# Altium PCB CardioBit 12-Lead PoC Routed PCB.pcbdoc (part 2 of 2)
Units mm, origin at the board's own origin, x right, y up, seen from the top; angles counter-clockwise.
Board outline 307.5 x 200 mm, 2 copper layers (Top Layer, Bottom Layer); 149 components, 164 nets, 497 pads, 199 vias.
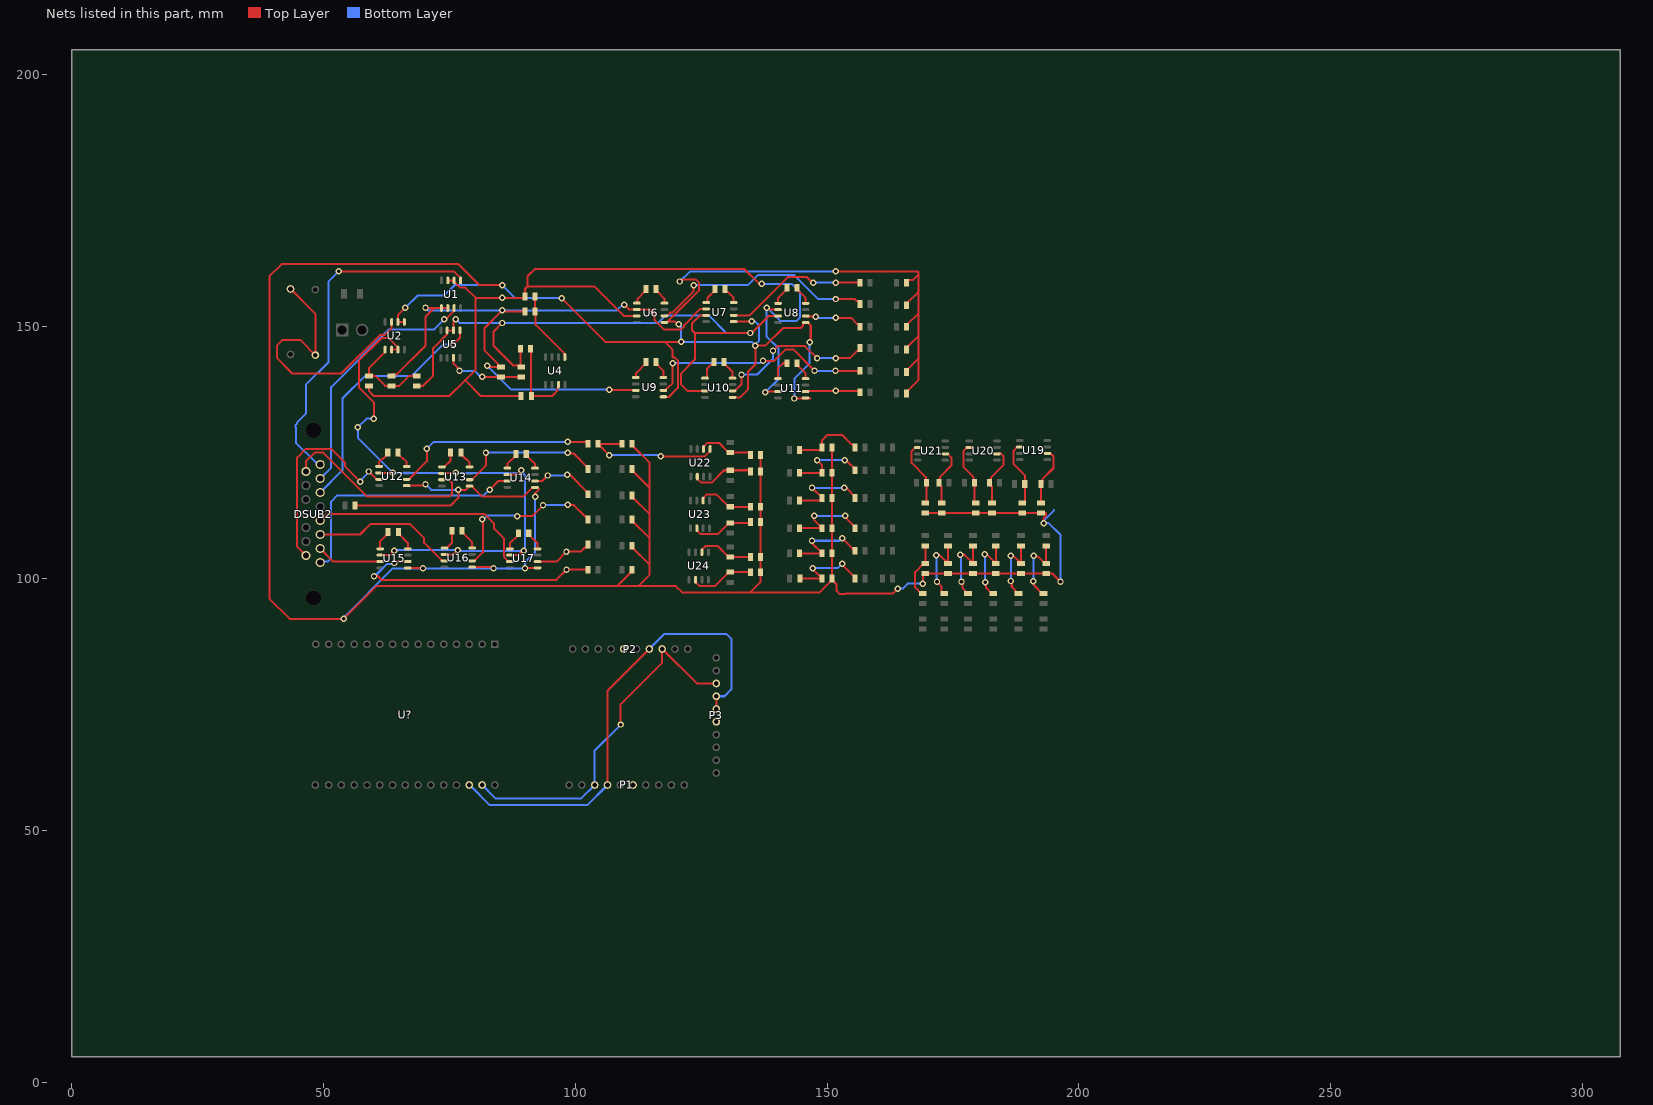
[diagram p2: the nets of this part, all layers, seen from the top]

## Via types
v1: diameter 1.27, hole 0.711, Top Layer to Bottom Layer, 199 vias

## Nets (pads, with @x,y where several pads share a name; then routed paths per layer and width w, separated by ;. In a path a pad name is that pad's centre, name@x,y a point inside that pad or via, vN(x,y) a via of type N, cw(c..) or ccw(c..) an arc to the next point about the centre after c; other vN are vias at no path point) (continued)
HPV6: C13.2 R36.2 U22.5 | length 28.9
  Top Layer w0.4: v1(106.75,124.5) C13.2@104.5,126.75 R36.2@109.25,126.75 ; v1(117,124.25) 125.73,124.25 126.75,125.27 U22.5@126.75,125.73
  Bottom Layer w0.4: v1(106.75,124.5) 116.75,124.5 v1(117,124.25)
LA: DSUB2.1 U1.5 | length 69.5
  Top Layer w0.4: v1(53,161) 75.88,161 77.216,159.664 U1.5@77.216,159.204
  Bottom Layer w0.4: DSUB2.1@49.34,122.639 48.961,122.639 48.54,123.06 48.44,123.06 44.5,127 44.5,130 44.416,130.084 44.416,130.416 44.708,130.708 44.708,130.958 46.5,132.75 46.5,138.5 51,143 51,159 v1(53,161)
LA_BUF: R4.1 R7.2 R13.1 U1.6 U1.7 U6.3 U8.2 U11.3 | length 190.2
  Top Layer w0.4: R4.1@59,138.25 59,137.25 60,136.25 75,136.25 78.125,139.375 ; U1.7@74.676,159.204 U1.6@75.946,159.204 75.946,158.798 76.038,158.706 76.188,158.706 77.144,157.75 78.17,157.75 80.198,155.722 ; R13.1@89.25,136.25 81.25,136.25 78.125,139.375 ; R7.2@90,155.75 v1(85.5,155.75) 80.227,155.75 80.198,155.722 ; R7.2@90,156 90,157.5 90.5,158 ; U6.3@112.218,152.148 109.602,152.148 103.75,158 90.5,158 ; v1(137,158.5) 136.5,158.5 133.5,161.5 92,161.5 90.5,160 90.5,158 ; v1(137.75,137) 137.85,137.1 140.2,137.1 U11.3@140.238,137.138 ; v1(138,153.75) 138.235,153.75 138.6,153.385 U8.2@140.26,153.385 ; 78.125,139.375 80.142,141.392 80.142,155.665 80.198,155.722
  Bottom Layer w0.4: v1(137,158.5) 142.941,158.5 144.589,156.852 144.589,151.799 143.951,151.161 140.679,151.161 138.09,153.75 v1(138,153.75) 138,148.04 140.339,145.701 140.339,139.589 v1(137.75,137)
LL: DSUB2.3 U5.5 | length 50.3
  Top Layer w0.4: v1(75.75,146.5) 77.089,147.839 U5.5@77.089,149.298
  Bottom Layer w0.4: DSUB2.3@49.34,117.079 53.75,121.49 53.75,135.75 58.25,140.25 67.5,140.25 73.75,146.5 v1(75.75,146.5)
LL_BUF: R3.1 R9.1 R14.1 U5.6 U5.7 U7.3 U8.3 U10.3 | length 135.3
  Top Layer w0.4: R3.1@68.5,138.25 69.75,138.25 71.75,140.25 71.75,145.75 74.511,148.511 74.511,149.26 U5.7@74.549,149.298 U5.6@75.819,149.298 75.819,151.069 v1(76.25,151.5) ; v1(85.5,150.75) 83.75,149 83.75,146.25 87.7,142.3 88.95,142.3 R9.1@89.125,142.125 ; R14.1@88.875,145.875 R14.1@89.125,145.625 R9.1@89.125,142.125 ; R9.1@89.25,142 R9.1@89.125,142.125 ; U10.3@125.738,137.258 125.73,137.25 122.25,137.25 121,138.5 121,140.75 123.75,143.5 123.75,148.75 ; U7.3@125.968,152.278 124.778,152.278 123.169,150.669 123.169,149.331 123.75,148.75 ; U8.3@140.26,152.115 138.365,152.115 135,148.75 v1(134.75,148.75) 123.75,148.75
  Bottom Layer w0.4: v1(76.25,151.5) 77,150.75 v1(85.5,150.75) 116.475,150.75 117.975,152.25 126.509,152.25 130.009,148.75 v1(134.75,148.75)
LPAVF: C21.1 R68.1 R82.2 | length 11.3
  Top Layer w0.4: R82.2@169,97 168.725,97 167.5,98.225 167.5,101.275 169.225,103 C21.1@169.5,103 R68.1@169.5,106.5
LPAVL: C20.1 R67.1 R84.2 | length 14.9
  Top Layer w0.4: v1(171.707,104.64) 172.36,104.64 C20.1@174,103 R67.1@174,106.5 ; v1(171.818,99.324) 171.818,99.322 172.69,98.45 172.69,97.367 172.99,97.067 R84.2@173.265,97.067
  Bottom Layer w0.4: v1(171.707,104.64) 171.707,99.435 v1(171.818,99.324)
LPAVR: C17.1 R64.1 R80.2 | length 15.1
  Top Layer w0.4: v1(181.342,104.806) 181.694,104.806 C17.1@183.5,103 R64.1@183.5,106.5 ; v1(181.397,99.269) 181.563,99.102 181.563,98.162 182.725,97 R80.2@183,97
  Bottom Layer w0.4: v1(181.342,104.806) 181.342,99.324 v1(181.397,99.269)
LPL1: C14.1 R61.1 R73.2 | length 14.4
  Top Layer w0.4: v1(186.5,99.5) 186.666,99.334 186.666,98.334 187.425,97.575 187.425,97.3 187.725,97 R73.2@188,97 ; v1(186.5,104.5) 187,104.5 C14.1@188.5,103 R61.1@188.5,106.5
  Bottom Layer w0.4: v1(186.5,99.5) v1(186.5,104.5)
LPL2: C15.1 R62.1 R76.2 | length 15.2
  Top Layer w0.4: v1(190.921,99.49) 191.087,99.324 191.087,98.638 192.725,97 R76.2@193,97 ; v1(191,104.5) 191.166,104.334 191.891,104.334 193.225,103 C15.1@193.5,103 R62.1@193.5,106.5
  Bottom Layer w0.4: v1(190.921,99.49) 191,99.57 v1(191,104.5)
LPL3: C16.1 R63.1 R78.2 | length 15.3
  Top Layer w0.4: v1(176.469,104.75) 177.25,104.75 C16.1@179,103 R63.1@179,106.5 ; v1(176.691,99.379) 176.856,99.214 176.856,98.144 177.425,97.575 177.425,97.3 177.725,97 R78.2@178,97
  Bottom Layer w0.4: v1(176.469,104.75) 176.58,104.64 176.58,99.49 v1(176.691,99.379)
LPV1: C19.1 R66.1 R96.2 | length 17.3
  Top Layer w0.4: R66.1@144.592,100 C19.1@149,100 147.177,101.823 v1(147.177,102.048) ; v1(153,102.911) 153,102.775 155.5,100.275 R96.2@155.5,100
  Bottom Layer w0.4: v1(147.177,102.048) 152.116,102.048 152.979,102.911 v1(153,102.911)
LPV2: C18.1 R65.1 R93.2 | length 17.7
  Top Layer w0.4: R65.1@144.5,105 C18.1@149,105 147,107 v1(147,107.5) ; v1(153,108) 153,107.978 155,105.978 155,105.734 155.266,105.734 R93.2@155.5,105.5
  Bottom Layer w0.4: v1(147,107.5) 152.5,107.5 v1(153,108)
LPV3: C25.1 R72.1 R91.2 | length 17.1
  Top Layer w0.4: R72.1@144.5,110 C25.1@149,110 147.411,111.589 v1(147.411,112.443) ; v1(153.639,112.49) 153.805,112.323 153.805,111.97 155.5,110.275 R91.2@155.5,110
  Bottom Layer w0.4: v1(147.411,112.443) 153.592,112.443 v1(153.639,112.49)
LPV4: C24.1 R71.1 R89.2 | length 17.2
  Top Layer w0.4: R71.1@144.5,115.5 148.7,115.5 149,115.8 C24.1@149,116 v1(147,118) ; v1(153.405,118.062) 153.571,117.896 153.879,117.896 155.5,116.275 R89.2@155.5,116
  Bottom Layer w0.4: v1(147,118) 153.343,118 v1(153.405,118.062)
LPV5: C23.1 R70.1 R87.2 | length 15.9
  Top Layer w0.4: R70.1@144.5,121 C23.1@149,121 149,122.5 v1(148,123.5) ; v1(153.5,123.5) 153.666,123.334 153.941,123.334 155.5,121.775 R87.2@155.5,121.5
  Bottom Layer w0.4: v1(148,123.5) v1(153.5,123.5)
LPV6: C22.1 R69.1 R85.2 | length 14.4
  Top Layer w0.4: R69.1@144.5,125.5 148.7,125.5 149,125.8 C22.1@149,126 149,127.5 150,128.5 153,128.5 154.925,126.575 155.2,126.575 155.5,126.275 R85.2@155.5,126
M1_1: 
M1_2: 
M1_3: 
M1_4: 
M1_5: 
M1_6: 
M1_7: 
M1_8: 
M1_11: 
M1_12: 
M1_13: 
M1_14: 
M1_15: 
M1_16: 
M1_17: 
M1_18: 
M1_19: 
M1_20: 
M1_21: 
M1_22: 
M1_23: 
M1_24: 
M1_25: 
M1_26: 
M1_27: 
M1_29: 
M1_30: 
P1_6: P1.6
P2_6: P2.6
P3_6: P3.6
PC1: DSUB2.5 U17.3 | length 45
  Top Layer w0.4: DSUB2.5@49.34,111.519 50.659,112.839 81.951,112.839 83.874,110.917 83.874,109.876 85.796,107.954 85.796,104.323 86.512,103.607 86.512,103.457 86.604,103.365 U17.3@87.01,103.365
PC2: DSUB2.6 U16.3 | length 29.1
  Top Layer w0.4: DSUB2.6@49.34,108.738 57.238,108.738 59.365,110.865 67.135,110.865 69.983,108.017 69.983,107.097 73.56,103.52 U16.3@74.02,103.52
PC3: DSUB2.7 U15.3 | length 13
  Top Layer w0.4: DSUB2.7@49.34,105.959 51.934,103.365 U15.3@61.26,103.365
PC4: DSUB2.8 U14.3 | length 50.5
  Top Layer w0.4: v1(83,117.661) 84.704,119.365 U14.3@86.51,119.365
  Bottom Layer w0.4: DSUB2.8@49.34,103.178 49.502,103.34 50.84,103.34 51.5,104 51.5,115.25 52.75,116.5 81.839,116.5 v1(83,117.661)
PC5: DSUB2.9 U13.3 | length 40.1
  Top Layer w0.4: DSUB2.9@46.5,121.25 46.5,123.25 48.25,125 49.96,125 58.71,116.25 75,116.25 75.5,116.75 75.5,118.997 74.901,119.596 U13.3@73.491,119.596
PC6: DSUB2.15 U12.3 | length 41.9
  Top Layer w0.4: DSUB2.15@46.5,104.567 44.75,106.317 44.75,124 46.5,125.75 51.5,125.75 54.292,122.958 54.292,122.208 v1(57.25,119.25) ; v1(59,121.25) 59.01,121.25 60.55,119.71 U12.3@61.02,119.71
  Bottom Layer w0.4: v1(57.25,119.25) 57.25,119.375 59,121.125 v1(59,121.25)
PRE_AVF: C6.1 U10.6 | length 33
  Top Layer w0.4: U10.6@131.218,137.258 131.678,137.258 133,138.58 v1(133,140.5) ; v1(139.25,145.25) 140.154,146.154 145.596,146.154 v1(148,143.75) ; v1(151.75,143.75) 154.5,143.75 155.925,145.175 156.2,145.175 156.5,145.475 C6.1@156.5,145.75
  Bottom Layer w0.4: v1(133,140.5) 136.08,140.5 139.25,143.67 v1(139.25,145.25) ; v1(148,143.75) v1(151.75,143.75)
PRE_AVL: C7.1 U11.6 | length 11.3
  Top Layer w0.4: U11.6@145.718,137.138 145.83,137.25 v1(151.75,137.25) 156.25,137.25 C7.1@156.5,137 C7.1@156.25,136.75
PRE_AVR: C5.1 U9.6 | length 47.2
  Top Layer w0.4: U9.6@117.49,137.365 117.896,137.365 117.988,137.457 117.988,137.585 118.284,137.881 118.393,137.881 119.306,138.795 v1(119.306,142.781) ; v1(137.27,143.23) 139.48,143.23 141.75,145.5 143.25,145.5 v1(147.5,141.25) ; v1(151.663,141.257) 156.493,141.257 C5.1@156.5,141.25 156.5,141.057 C5.1@156.2,140.757
  Bottom Layer w0.4: v1(119.306,142.781) 136.586,142.781 137.035,143.23 v1(137.27,143.23) ; v1(147.5,141.25) 151.656,141.25 v1(151.663,141.257)
PRE_LI: C2.1 U6.6 | length 45.4
  Top Layer w0.4: U6.6@117.698,152.148 118.158,152.148 118.812,152.802 119.227,152.802 123.5,157.075 v1(123.5,158.25) ; v1(151.75,155.5) 155.5,155.5 155.925,155.075 156.2,155.075 156.5,154.775 C2.1@156.5,154.5
  Bottom Layer w0.4: v1(123.5,158.25) 134.25,158.25 136.25,160.25 143.5,160.25 148.25,155.5 v1(151.75,155.5)
PRE_LII: C3.1 U7.6 | length 29.3
  Top Layer w0.4: U7.6@131.448,152.278 134.611,152.278 142.179,159.846 146,159.846 147.096,158.75 v1(147.25,158.75) ; v1(151.75,158.75) C3.1@156.5,158.75 156.5,158.55 C3.1@156.2,158.25
  Bottom Layer w0.4: v1(147.25,158.75) v1(151.75,158.75)
PRE_LIII: C4.1 U8.6 | length 11.8
  Top Layer w0.4: U8.6@145.74,152.115 145.778,152.077 147.673,152.077 v1(147.75,152) ; v1(151.75,151.75) 154.75,151.75 155.925,150.575 156.2,150.575 156.5,150.275 C4.1@156.5,150
  Bottom Layer w0.4: v1(147.75,152) 148,151.75 v1(151.75,151.75)
PRE_V1: C8.1 U17.6 | length 11.6
  Top Layer w0.4: U17.6@92.49,103.365 96.267,103.365 v1(98.235,105.333) 101.083,105.333 101.925,106.175 102.2,106.175 102.5,106.475 C8.1@102.5,106.75
PRE_V2: C9.1 U16.6 | length 33.4
  Top Layer w0.4: U16.6@79.5,103.52 79.96,103.52 81.654,105.214 81.654,111.596 v1(81.5,111.75) ; v1(88.488,112.391) 91.401,112.391 v1(93.586,114.576) ; v1(98.459,114.688) 98.592,114.556 99.694,114.556 101.925,112.325 102.2,112.325 102.5,112.025 C9.1@102.5,111.75
  Bottom Layer w0.4: v1(81.5,111.75) 81.735,111.75 82.485,112.5 88.597,112.5 v1(88.488,112.391) ; v1(93.586,114.576) 98.347,114.576 v1(98.459,114.688)
PRE_V3: C10.1 U15.6 | length 51.5
  Top Layer w0.4: v1(60.02,100.48) 60.04,100.5 60.75,100.5 61.5,99.75 96.25,99.75 v1(98.25,101.75) C10.1@102.5,101.75 ; v1(64,103.089) 64.235,103.089 64.511,103.365 U15.6@66.74,103.365
  Bottom Layer w0.4: v1(60.02,100.48) 60.04,100.5 60.21,100.5 62.632,102.923 63.834,102.923 v1(64,103.089)
PRE_V4: C11.1 U14.6 | length 12.8
  Top Layer w0.4: U14.6@91.99,119.365 93.445,119.365 v1(94.538,120.458) ; v1(98.403,120.626) 98.57,120.46 99.065,120.46 102.5,117.025 C11.1@102.5,116.75
  Bottom Layer w0.4: v1(94.538,120.458) 98.235,120.458 v1(98.403,120.626)
PRE_V5: C12.1 U13.6 | length 28.8
  Top Layer w0.4: U13.6@78.99,119.615 79.45,119.615 82.25,122.415 v1(82.25,125) ; v1(98.5,125) 98.666,124.834 99.691,124.834 102.5,122.025 C12.1@102.5,121.75
  Bottom Layer w0.4: v1(82.25,125) v1(98.5,125)
PRE_V6: C13.1 U12.6 | length 40.7
  Top Layer w0.4: U12.6@66.5,119.71 66.96,119.71 70.5,123.25 v1(70.5,125.75) ; v1(98.459,127.124) 102.2,127.124 102.5,126.824 C13.1@102.5,126.75
  Bottom Layer w0.4: v1(70.5,125.75) 71.874,127.124 v1(98.459,127.124)
R9_2: R9.2 R10.2 U5.3 | length 16.1
  Top Layer w0.4: U5.3@75.819,143.818 75.819,142.651 77,141.47 v1(77,141.25) ; v1@81.5,140.167 v1(81.5,140.084) 81.542,140.042 85.208,140.042 R10.2@85.25,140 R9.2@89.25,140 R9.2@89.083,140.167
  Bottom Layer w0.4: v1(77,141.25) 80,141.25 81.166,140.084 v1(81.5,140.084)
R19_1: R19.1 U12.1 | length 3.6
  Top Layer w0.4: U12.1@61.02,122.25 61.02,123.15 61.657,123.787 61.813,123.787 62.75,124.725 R19.1@62.75,125
R19_2: R19.2 U12.8 | length 3.6
  Top Layer w0.4: R19.2@64.75,125 64.75,124.725 65.687,123.787 65.863,123.787 66.5,123.15 U12.8@66.5,122.25
R20_1: R20.1 U13.1 | length 3.8
  Top Layer w0.4: U13.1@73.51,122.155 73.97,122.155 75.25,123.435 R20.1@75.25,125
R20_2: R20.2 U13.8 | length 3.6
  Top Layer w0.4: R20.2@77.25,125 77.25,124.725 78.235,123.74 78.305,123.74 78.99,123.055 U13.8@78.99,122.155
R21_1: R21.1 U14.1 | length 3.6
  Top Layer w0.4: U14.1@86.51,121.905 86.51,122.805 87.195,123.49 87.265,123.49 88.25,124.475 R21.1@88.25,124.75
R21_2: R21.2 U14.8 | length 3.6
  Top Layer w0.4: R21.2@90.25,124.75 90.25,124.475 91.725,123 91.766,123 92,122.766 92,121.915 U14.8@91.99,121.905
R22_1: R22.1 U15.1 | length 4
  Top Layer w0.4: U15.1@61.26,105.905 61.25,105.915 61.25,107.363 62.837,108.95 R22.1@62.837,109.225
R22_2: R22.2 U15.8 | length 4.1
  Top Layer w0.4: R22.2@64.837,109.225 64.837,108.95 66.74,107.047 U15.8@66.74,105.905
R23_1: R23.1 U16.1 | length 4.3
  Top Layer w0.4: U16.1@74.02,106.06 74.48,106.06 75.5,107.08 R23.1@75.5,109.5
R23_2: R23.2 U16.8 | length 4.3
  Top Layer w0.4: R23.2@77.5,109.5 77.5,109.225 79.5,107.225 U16.8@79.5,106.06
R24_1: R24.1 U17.1 | length 3.8
  Top Layer w0.4: U17.1@87.01,105.905 87.01,106.985 88.75,108.725 R24.1@88.75,109
R24_2: R24.2 U17.8 | length 3.8
  Top Layer w0.4: R24.2@90.75,109 90.75,108.725 92.49,106.985 U17.8@92.49,105.905
R41_1: R41.1 R42.2 U20.6 | length 11.9
  Top Layer w0.4: R41.1@182.75,115 182.75,118.225 182.25,118.725 R42.2@182.25,119 182.537,119.287 182.537,120.037 185,122.5 185,124.315 184.45,124.865 U20.6@183.99,124.865
R43_2: R43.2 R44.2 U20.2 | length 12.8
  Top Layer w0.4: U20.2@178.25,126.04 177.79,126.04 177.036,125.286 177.036,122.214 179.109,120.141 179.109,119.141 R44.2@179.25,119 179.25,115.25 R43.2@179.5,115
R49_1: R49.1 R50.2 U22.6 | length 11.2
  Top Layer w0.4: U22.6@125.48,125.73 125.48,126.19 126.234,126.944 128.531,126.944 130.475,125 R50.2@130.75,125 134.45,125 134.75,124.7 R49.1@134.75,124.5
R51_2: R51.2 R52.2 U22.2 | length 12.4
  Top Layer w0.4: U22.2@124.21,120.25 124.21,119.79 124.964,119.036 127.062,119.036 129.526,121.5 R52.2@130.75,121.5 134.5,121.5 R51.2@134.75,121.25
R57_1: R57.1 R58.2 U24.6 | length 11.3
  Top Layer w0.4: U24.6@125.135,105.24 125.135,105.7 125.889,106.454 128.271,106.454 130.475,104.25 R58.2@130.75,104.25 R57.1@134.75,104.25
R59_2: R59.2 R60.2 U24.2 | length 12.8
  Top Layer w0.4: U24.2@123.865,99.76 123.865,99.3 124.619,98.546 127.771,98.546 130.475,101.25 R60.2@130.75,101.25 R59.2@134.75,101.25
RA: DSUB2.2 U1.3 | length 50.3
  Top Layer w0.4: v1(74,151.5) 74.25,151.5 75.75,153 75.75,153.014 75.946,153.21 U1.3@75.946,153.724
  Bottom Layer w0.4: DSUB2.2@49.34,119.858 51.5,122.018 51.5,138 63,149.5 72,149.5 v1(74,151.5)
RA_BUF: R5.1 R6.2 R10.1 U1.1 U1.2 U6.2 U7.2 U9.3 | length 135.6
  Top Layer w0.4: R5.1@63.5,140.25 63.787,140.537 64.537,140.537 70.25,146.25 70.25,152 71.974,153.724 U1.1@73.406,153.724 U1.2@74.676,153.724 ; v1(70.25,153.75) 72.224,153.75 ; v1(82.5,142.25) 82.75,142 R10.1@84.975,142 ; R10.1@85.25,142 R10.1@84.975,142 ; v1(85.5,153.25) 82,149.75 82,145.25 84.675,142.575 84.675,142.3 R10.1@84.975,142 ; v1@85.985,153 R6.2@90,153 ; v1(106.75,137.5) 106.847,137.403 111.972,137.403 U9.3@112.01,137.365 ; v1(109.744,154.374) 110.7,153.418 U6.2@112.218,153.418 114.832,153.418 115.75,152.5 115.75,151.3 117.639,149.411 120.951,149.411 121.589,150.049 121.589,150.336 124.801,153.548 U7.2@125.968,153.548
  Bottom Layer w0.4: v1(70.25,153.75) 70.75,153.25 v1(85.5,153.25) 108.25,153.25 109.5,154.5 109.618,154.5 v1(109.744,154.374) ; v1(82.5,142.25) 87.25,137.5 v1(106.75,137.5)
S$81: 
S$83: 
S$88: 
S$90: 
S$94: 
SCL: P1.3 P2.3 P3.3 U?.29 | length 70.7
  Top Layer w0.4: v1(109,71) 109,75 117.24,83.24 P2.3@117.24,86 124.08,79.16 P3.3@128,79.16
  Bottom Layer w0.4: U?.29@81.48,59 84.134,56.346 101.186,56.346 P1.3@103.84,59 103.84,65.84 v1(109,71)
SDA: P1.4 P2.4 P3.4 P3.5 U?.28 | length 95.3
  Top Layer w0.4: P1.4@106.38,59 106.38,77.68 P2.4@114.7,86 ; P3.5@128,74.08 P3.4@128,76.62
  Bottom Layer w0.4: U?.28@78.94,59 79,59 83,55 102.38,55 P1.4@106.38,59 ; P2.4@114.7,86 117.7,89 130,89 131,88 131,78 129.62,76.62 P3.4@128,76.62
U2_3: R1.2 R2.2 U2.3 | length 55.9
  Top Layer w0.4: R2.2@43.434,157.503 48.387,152.55 R1.2@48.387,144.376 45.443,147.32 41.783,147.32 40.767,146.304 40.767,143.744 43.795,140.716 53.541,140.716 61.229,148.404 62.171,148.404 63.5,149.733 U2.3@63.5,150.949
U2_5: R3.2 R4.2 R5.2 U2.5 | length 17.7
  Top Layer w0.4: U2.5@62.23,145.469 62.23,145.009 59,141.779 R4.2@59,140.25 60.25,140.25 62.25,138.25 R5.2@63.5,138.25 65,138.25 67,140.25 R3.2@68.5,140.25
U4_3: R13.2 R14.2 U4.3 | length 16.3
  Top Layer w0.4: R14.2@91.125,145.625 91.187,145.563 91.187,136.312 R13.2@91.25,136.25 95.375,136.25 96.5,137.375 96.5,137.861 96.635,137.996 U4.3@96.635,138.51
U4_5: R6.1 R7.1 U4.5 | length 14.5
  Top Layer w0.4: R7.1@92,156 R6.1@92,153 92.125,152.875 92.125,150.375 97.867,144.633 97.867,144.028 U4.5@97.905,143.99
U6_1: R11.1 U6.1 | length 3.6
  Top Layer w0.4: U6.1@112.218,154.688 112.271,154.688 112.363,154.78 112.363,155.588 114,157.225 R11.1@114,157.5
U6_8: R11.2 U6.8 | length 3.6
  Top Layer w0.4: R11.2@116,157.5 116,157.225 116.3,156.925 116.361,156.925 117.698,155.588 U6.8@117.698,154.688
U7_1: R12.1 U7.1 | length 3.5
  Top Layer w0.4: U7.1@125.968,154.818 126.151,154.818 126.243,154.91 126.243,155.718 127.75,157.225 R12.1@127.75,157.5
U7_8: R12.2 U7.8 | length 3.5
  Top Layer w0.4: R12.2@129.75,157.5 129.75,157.225 130.05,156.925 130.241,156.925 131.448,155.718 U7.8@131.448,154.818
U8_1: R15.1 U8.1 | length 3.8
  Top Layer w0.4: U8.1@140.26,154.655 140.26,155.735 142,157.475 R15.1@142,157.75
U8_8: R15.2 U8.8 | length 3.8
  Top Layer w0.4: R15.2@144,157.75 144,157.475 145.74,155.735 U8.8@145.74,154.655
U9_1: R16.1 U9.1 | length 3.9
  Top Layer w0.4: U9.1@112.01,139.905 112.08,139.975 112.08,140.805 114,142.725 R16.1@114,143
U9_8: R16.2 U9.8 | length 3.7
  Top Layer w0.4: R16.2@116,143 116,142.725 117.49,141.235 U9.8@117.49,139.905
U10_1: R17.1 U10.1 | length 4.3
  Top Layer w0.4: U10.1@125.738,139.798 126.05,139.798 126.143,139.89 126.143,141.643 126.925,142.425 127.2,142.425 127.5,142.725 R17.1@127.5,143
U10_8: R17.2 U10.8 | length 3.9
  Top Layer w0.4: R17.2@129.5,143 129.5,142.725 131.218,141.007 U10.8@131.218,139.798
U11_1: R18.1 U11.1 | length 4.2
  Top Layer w0.4: U11.1@140.238,139.678 140.238,141.738 141.25,142.75 R18.1@142,142.75
U11_8: R18.2 U11.8 | length 3.9
  Top Layer w0.4: R18.2@144,142.75 144,142.475 145.718,140.757 U11.8@145.718,139.709 ; U11.8@145.656,139.77 U11.8@145.718,139.709 ; U11.8@145.718,139.678 U11.8@145.718,139.709
U19_2: R37.2 R38.2 U19.2 | length 13.1
  Top Layer w0.4: U19.2@188.26,126.135 187.8,126.135 187.046,125.381 187.046,122.704 189.25,120.5 R37.2@189.25,118.75 189.25,115.3 188.95,115 R38.2@188.75,115
U19_6: R39.2 R40.1 U19.6 | length 11.7
  Top Layer w0.4: R40.1@192.5,115 R39.2@192.5,118.75 192.787,119.037 192.787,119.787 194.954,121.954 194.954,124.265 194.454,124.765 194.354,124.765 194.254,124.865 U19.6@193.74,124.865
U21_2: R45.2 R46.2 U21.2 | length 13.1
  Top Layer w0.4: U21.2@168,126.04 167.54,126.04 166.786,125.286 166.786,122.964 169.609,120.141 169.609,119.141 R45.2@169.75,119 169.75,115.25 R46.2@169.5,115
U21_6: R47.2 R48.1 U21.6 | length 11.8
  Top Layer w0.4: R48.1@172.75,115 172.75,118.225 172.25,118.725 R47.2@172.25,119 172.391,119.141 172.391,120.141 174.694,122.444 174.694,124.016 173.94,124.77 U21.6@173.48,124.77
U23_2: R53.2 R54.2 U23.2 | length 12.4
  Top Layer w0.4: U23.2@124.115,110.01 124.115,109.55 124.869,108.796 128.271,108.796 130.475,111 R53.2@130.75,111 134.5,111 R54.2@134.75,111.25
U23_6: R55.2 R56.1 U23.6 | length 11.2
  Top Layer w0.4: U23.6@125.385,115.49 125.385,115.95 126.139,116.704 128.021,116.704 130.475,114.25 R55.2@130.75,114.25 R56.1@134.75,114.25
VGND: C14.2 C15.2 C16.2 C17.2 C18.2 C19.2 C20.2 C21.2 C22.2 C23.2 C24.2 C25.2 R25.1 R26.1 R27.1 R28.1 R29.1 R30.1 R31.1 R32.1 R33.1 R34.1 R35.1 R36.1 R38.1 R40.2 R41.2 R43.1 R46.1 R48.2 R49.2 R51.1 R54.1 R56.2 R57.2 R59.1 R97.2 U2.1 U2.2 U6.5 U7.5 U8.5 U9.5 U10.5 U11.5 U12.5 U13.5 U14.5 U15.5 U16.5 U17.5 | length 815.3
  Top Layer w0.4: R97.2@56.25,114.5 75.25,114.5 76.753,116.003 v1(76.753,117.617) 78.262,117.617 U13.5@78.99,118.345 79.405,118.345 81.5,116.25 89.685,116.25 91.53,118.095 U14.5@91.99,118.095 92.504,118.095 92.831,117.769 92,116.938 ; U2.1@66.04,150.949 U2.2@64.77,150.949 64.77,152.27 v1(66.25,153.75) ; U12.5@66.5,118.44 v1@69.705,118.44 ; U15.5@66.74,102.095 66.778,102.057 69.693,102.057 v1(69.75,102) ; U16.5@79.5,102.25 v1@83.265,102.25 ; v1(85.5,158.25) 80.967,158.25 76.798,162.419 41.669,162.419 39.25,160 39.25,96 43.25,92 v1(54,92) 60.5,98.5 108.275,98.5 ; v1(90,102) 90.057,102.057 92.452,102.057 U17.5@92.49,102.095 ; v1(97.303,155.68) 105.982,147 117.75,147 ; R33.1@111.25,101.75 111.25,101.475 108.275,98.5 ; R31.1@111.25,106.5 111.25,106.225 114.75,102.725 ; R32.1@111.25,111.75 111.25,111.475 114.75,107.975 ; R34.1@111.25,116.5 111.25,116.225 114.75,112.725 ; R35.1@111.25,121.75 111.25,121.475 114.75,117.975 ; R36.1@111.25,126.75 111.25,126.475 114.75,122.975 114.75,117.975 ; U9.5@117.49,136.095 118.595,136.095 120.346,137.846 120.346,141.021 120.395,141.07 120.395,143.233 119.758,143.87 119.25,143.87 119.25,145.5 117.75,147 ; U6.5@117.698,150.878 117.736,150.916 U6.5@118.196,150.916 ; v1(120.5,150.5) 120.327,150.5 119.831,150.997 118.331,150.997 118.25,150.916 U6.5@118.196,150.916 ; v1(120.77,158.98) 121.005,158.98 121.429,159.404 123.886,159.404 124.589,158.701 124.589,157.239 119.498,152.148 119.428,152.148 U6.5@118.196,150.916 ; v1(121,147) 117.75,147 ; U10.5@131.218,135.988 132.738,135.988 134.25,137.5 134.25,141.007 135.75,142.507 v1(135.75,146.25) 137.75,146.25 141.25,149.75 144.75,149.75 145.242,150.242 145.242,150.753 145.334,150.845 U8.5@145.74,150.845 146.146,150.845 146.75,150.241 146.75,147.101 v1(146.538,146.889) ; U7.5@131.448,151.008 131.486,151.046 135.009,151.046 v1(135.049,151.086) ; R49.2@136.75,124.5 R51.1@136.75,121.25 R56.2@136.75,114.25 R54.1@136.75,111.25 R57.2@136.75,104.25 R59.1@136.75,101.25 136.75,99.25 134.738,97.238 ; v1(143.5,135.75) 146.678,135.75 ; C22.2@151,126 C23.2@151,121 C24.2@151,116 C25.2@151,110 C18.2@151,105 C19.2@151,100 C19.2@151,99.725 ; v1(151.75,161) 167.95,161 168.184,160.766 168.184,160.434 ; v1(164,98) 163,97 153.725,97 153.636,96.911 152.549,96.911 151.911,97.549 151.911,98.814 C19.2@151,99.725 ; R30.1@165.75,136.75 165.75,137.025 168.184,139.459 168.184,143.709 ; R28.1@165.75,141 165.75,141.275 168.184,143.709 ; R29.1@165.75,145.5 165.75,145.775 168.184,148.209 ; R27.1@165.75,150 165.75,150.275 168.184,152.709 ; R25.1@165.75,154.25 165.75,154.525 168.184,156.959 ; R26.1@165.75,158.75 165.75,159.025 166.05,159.325 167.075,159.325 168.184,160.434 ; v1(169,99) 169,100.7 169.3,101 C21.2@169.5,101 C20.2@174,101 C16.2@179,101 C17.2@183.5,101 C14.2@188.5,101 C15.2@193.5,101 194.703,101 v1(196.341,99.362) ; R46.1@169.5,113 R48.2@172.75,113 R43.1@179.5,113 R41.2@182.75,113 R38.1@188.75,113 R40.2@192.5,113 193.475,113 193.475,112.475 193,112 v1(193,111) ; 108.275,98.5 112.5,98.5 ; 112.5,98.5 114.75,100.75 114.75,102.725 ; 112.5,98.5 119.95,98.5 121.212,97.238 134.738,97.238 ; 114.75,102.725 114.75,107.975 ; 114.75,107.975 114.75,112.725 ; 114.75,112.725 114.75,117.975 ; 134.738,97.238 148.513,97.238 C19.2@151,99.725 ; 168.184,143.709 168.184,148.209 ; 168.184,148.209 168.184,152.709 ; 168.184,152.709 168.184,156.959 ; 168.184,156.959 168.184,160.434
  Bottom Layer w0.4: v1(54,92) 54,92.25 63.75,102 v1(69.75,102) v1(83.75,102) v1(90,102) 90,103.25 92,105.25 v1(92,116.25) ; v1(66.25,153.75) 68.75,156.25 74,156.25 76,158.25 v1(85.5,158.25) 88.07,155.68 v1(97.303,155.68) ; v1(70.25,118.75) 71.383,117.617 v1(76.753,117.617) ; v1(120.5,150.5) 121,150 v1(121,147) 135,147 v1(135.75,146.25) 135.75,146.485 136.5,147.235 136.5,150.25 135.664,151.086 v1(135.049,151.086) ; v1(120.77,158.98) 122.79,161 v1(151.75,161) ; v1(143.5,135.75) 143.5,139.675 146.538,142.712 v1(146.538,146.889) ; v1(164,98) 165,98 166,99 v1(169,99) ; 195.089,113.589 193,111.5 v1(193,111) 194,111 196.341,108.659 v1(196.341,99.362)
WCT: U2.6 U2.7 U12.2 U13.2 U14.2 U15.2 U16.2 U17.2 | length 126.7
  Top Layer w0.4: v1(60,131.75) 60,135 57,138 57,143.25 61.5,147.75 62.949,147.75 64.77,145.929 U2.7@64.77,145.469 U2.6@63.5,145.469 ; U12.2@61.02,120.98 61.03,120.99 63.74,120.99 v1(63.75,121) ; U15.2@61.26,104.635 63.118,104.635 63.963,105.48 v1(64.02,105.48) ; U13.2@73.51,120.885 73.548,120.923 76.173,120.923 v1(76.25,121) ; U16.2@74.02,104.79 75.768,104.79 76.631,105.654 v1(76.651,105.654) ; U14.2@86.51,120.635 86.548,120.673 88.423,120.673 v1(89.25,121.5) v1@89.25,121.265 ; U17.2@87.01,104.635 88.618,104.635 89.483,105.5 v1(89.75,105.5)
  Bottom Layer w0.4: v1(60,131.75) 58.541,131.75 v1(56.824,130.033) 56.824,127.926 v1(63.75,121) v1(76.25,121) 88.75,121 89.132,121.382 v1(89.25,121.5) 89.25,121.265 90,120.515 90,106 89.75,105.75 v1(89.75,105.5) 76.804,105.5 v1(76.651,105.654) 64.194,105.654 v1(64.02,105.48)
pads on no net: DSUB2. U?.1 U?.2 U?.3 U?.4 U?.5 U?.6 U?.7 U?.8 U?.9 U?.10 U?.12 U?.13 U?.16 U?.17 U?.18 U?.19 U?.20 U?.21 U?.22 U?.23 U?.24 U?.25 U?.26 U?.27 U?.30

## Keep-outs
Keep-Out Layer:
  lines w0.254: 38,54 38,165 198,165 198,54 38,54

## Silkscreen, mask and mechanical layers (free items; w line width, h text height)
Top Overlay:
  text "GND" at 81.504,160.004 h1
  text "VGND" at 80.504,157.754 h1
  text "LA_BUF" at 78.754,155.421 h1
  text "RA_BUF" at 78.754,152.921 h1
  text "LL_BUF" at 78.754,150.421 h1
  text "aVF_GT" at 98.754,143.671 h1
  text "aVR_GT" at 98.754,140.421 h1
  text "aVL_GT" at 70.754,134.671 h1
  text "12V" at 53.254,134.504 h1
  text "12V" at 137.929,133.636 h1
  text "GND" at 52.754,132.504 h1
  text "WCT" at 53.254,129.504 h1
  text "VGND" at 54.754,91.254 h1
Document:
  lines w0.003: 203.815,179.132 203.865,179.183

## Text inside footprints (layer, text, board x,y; h text height)
P1: Top Overlay "A3" at 122.001,60.27 h0.76 r90; Top Overlay "A2" at 119.461,60.27 h0.76 r90; Top Overlay "A1" at 116.921,60.27 h0.76 r90; Top Overlay "A0" at 114.381,60.27 h0.76 r90; Top Overlay "16Bit I2C ADC+PGA" at 103.332,69.577 h1.02; Top Overlay "ALRT" at 111.841,60.27 h0.76 r90; Top Overlay "ADDR" at 109.464,60.252 h0.76 r90; Top Overlay "SDA" at 106.761,60.27 h0.76 r90; Top Overlay "SCL" at 104.221,60.27 h0.76 r90; Top Overlay "GND" at 101.681,60.27 h0.76 r90; Top Overlay "VDD" at 99.141,60.27 h0.76 r90
P2: Top Overlay "VDD" at 121.939,84.73 h0.76 r270; Top Overlay "GND" at 119.399,84.73 h0.76 r270; Top Overlay "SCL" at 116.859,84.73 h0.76 r270; Top Overlay "SDA" at 114.319,84.73 h0.76 r270; Top Overlay "ADDR" at 111.616,84.748 h0.76 r270; Top Overlay "ALRT" at 109.239,84.73 h0.76 r270; Top Overlay "16Bit I2C ADC+PGA" at 117.748,75.423 h1.02 r180; Top Overlay "A0" at 106.699,84.73 h0.76 r270; Top Overlay "A1" at 104.159,84.73 h0.76 r270; Top Overlay "A2" at 101.619,84.73 h0.76 r270; Top Overlay "A3" at 99.079,84.73 h0.76 r270
P3: Top Overlay "A3" at 129.27,60.999 h0.76; Top Overlay "A2" at 129.27,63.539 h0.76; Top Overlay "A1" at 129.27,66.079 h0.76; Top Overlay "A0" at 129.27,68.619 h0.76; Top Overlay "16Bit I2C ADC+PGA" at 138.577,79.668 h1.02 r270; Top Overlay "ALRT" at 129.27,71.159 h0.76; Top Overlay "ADDR" at 129.252,73.536 h0.76; Top Overlay "SDA" at 129.27,76.239 h0.76; Top Overlay "SCL" at 129.27,78.779 h0.76; Top Overlay "GND" at 129.27,81.319 h0.76; Top Overlay "VDD" at 129.27,83.859 h0.76
U?: Top Overlay "802.11b/g/n" at 79.321,73.206 h0.51 r180; Top Overlay "PA  +25dBm" at 79.346,72.381 h0.51 r180; Top Overlay "ISM  2.4GHz" at 79.346,71.456 h0.51 r180; Top Overlay "HYSIRY" at 79.346,70.603 h0.51 r180; Top Overlay "ESP8266MOD" at 79.346,69.678 h0.51 r180; Top Overlay "VENDOR" at 83.766,70.593 h0.51 r180; Top Overlay "MODEL" at 83.766,69.668 h0.51 r180; Top Overlay "FI" at 66.24,70.43 h2.54; Top Overlay "D0" at 83.2,62.81 h1.27 r270; Top Overlay "D1" at 80.66,62.81 h1.27 r270; Top Overlay "D2" at 78.12,62.81 h1.27 r270; Top Overlay "D3" at 75.511,62.81 h1.27 r270; Top Overlay "D4" at 72.971,62.81 h1.27 r270; Top Overlay "3V" at 70.685,62.81 h1.27 r270; Top Overlay "G" at 69.484,62.048 h1.27 r90; Top Overlay "D5" at 65.42,62.81 h1.27 r270; Top Overlay "D6" at 62.88,62.81 h1.27 r270; Top Overlay "D7" at 60.525,62.81 h1.27 r270; Top Overlay "D8" at 57.8,62.81 h1.27 r270; Top Overlay "RX" at 55.26,62.81 h1.27 r270; Top Overlay "TX" at 52.72,62.81 h1.27 r270; Top Overlay "G" at 51.45,62.048 h1.27 r90; Top Overlay "3V" at 47.64,62.81 h1.27 r270; Top Overlay "Vin" at 47.825,85.14 h1.27 r272; Top Overlay "G" at 51.635,85.162 h1.27 r90; Top Overlay "RST" at 52.905,85.162 h1.27 r270; Top Overlay "EN" at 55.445,85.162 h1.27 r270; Top Overlay "3V" at 57.8,85.162 h1.27 r270; Top Overlay "G" at 61.61,84.908 h1.27 r90; Top Overlay "SK" at 63.065,84.908 h1.27 r270; Top Overlay "S0" at 65.351,84.908 h1.27 r270; Top Overlay "SC" at 67.891,84.908 h1.27 r270; Top Overlay "S1" at 70.431,84.908 h1.27 r270; Top Overlay "S2" at 73.294,85.162 h1.27 r270; Top Overlay "S3" at 75.58,85.162 h1.27 r270; Top Overlay "VU" at 78.12,85.162 h1.27 r270; Top Overlay "G" at 81.93,84.654 h1.27 r90; Top Overlay "A0" at 83.2,85.162 h1.27 r270; Top Overlay "new NodeMcu V3" at 49.453,79.066 h1.02 r270; Top Overlay "LoLin" at 52.016,78.531 h3.05 r271